# EAGLE board Charger (EAGLE 9.6.2)
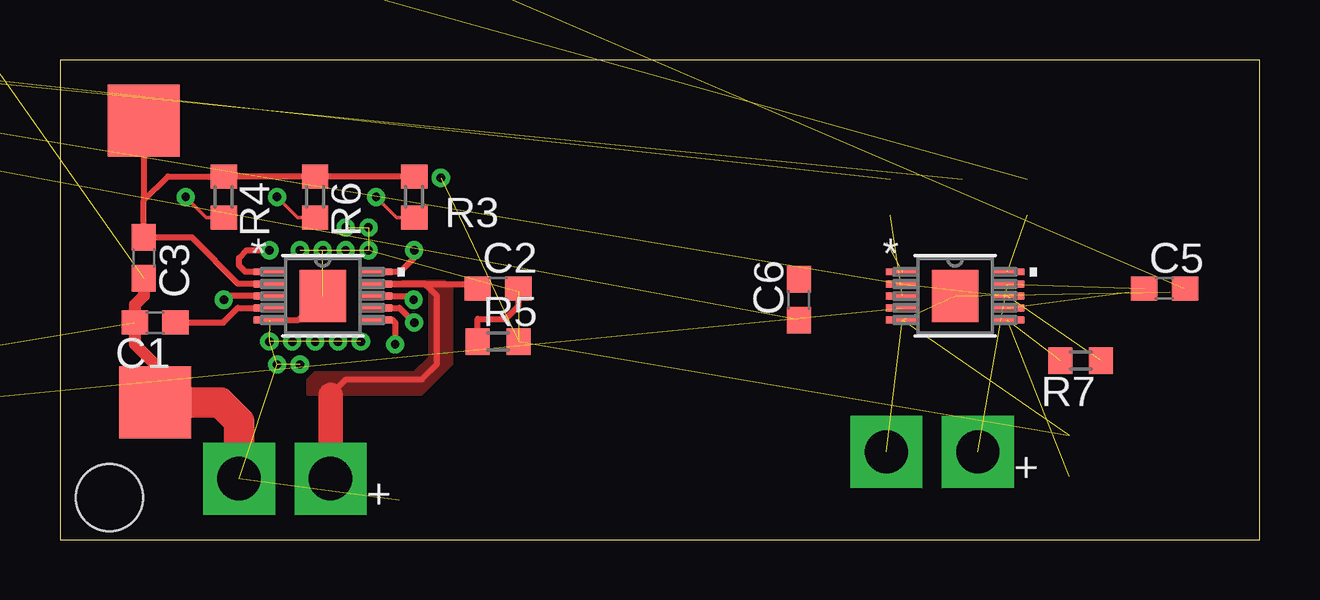
[diagram p0: board, top side]
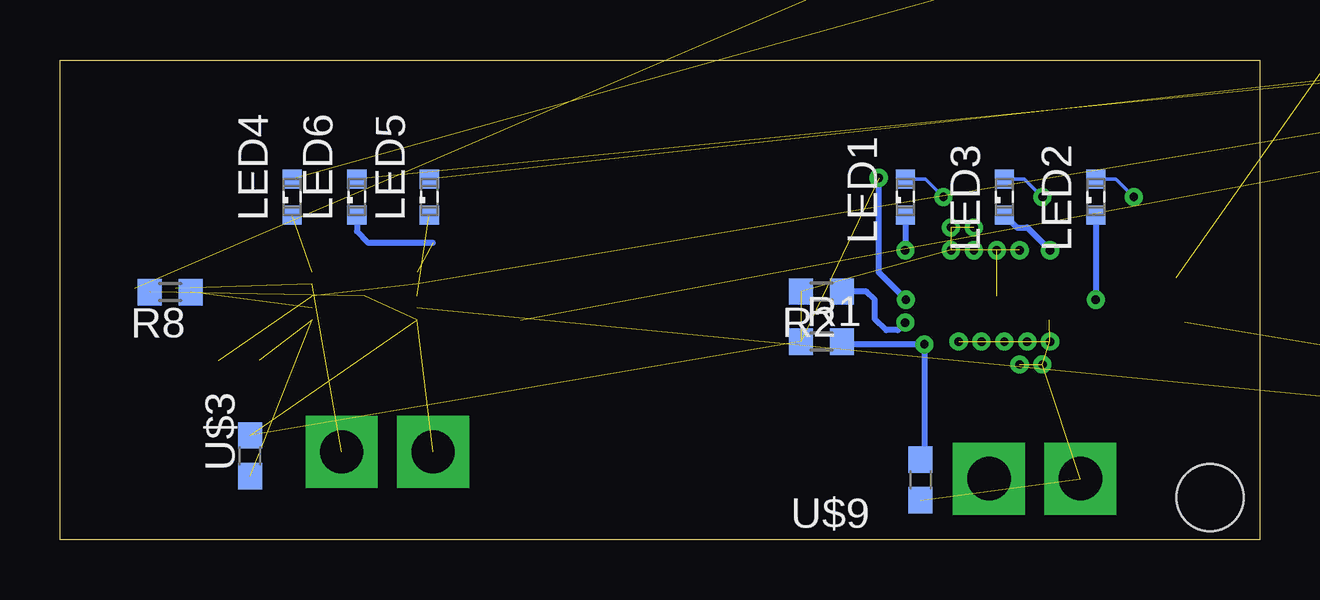
[diagram p1: board, bottom side, seen from below]

Size 50 x 20 mm. Coordinates in mm from the lower left corner, seen from the top.
Outline: 0,0 50,0 50,20 0,20 0,0
Copper layers (1*16): Top 0.035mm / dielectric 1.5mm / Bottom 0.035mm
Design rules "default": minimum track width 6mil, minimum drill 0.35mm, track to track 6mil, track to pad 6mil, pad to pad 6mil, via to via 6mil, smd to smd 6mil, copper to edge 40mil, drill to drill 6mil, minimum pad ring 10mil, minimum via ring 8mil, stop-mask expansion 4mil, vias tented up to drill 0mil, thermal gap 10mil
Holes 2.8 mm at 2.06,1.75

## Footprints (pad centres in the part's own frame; a part is rotated, then mirrored left to right if it is on the bottom)
BAT2 = drill 1.8 pad 3 square: P$1 0,0; P$2 3.81,0
C0603 = smd 1.1 x 1: 1 -0.85,0; 2 0.85,0
SML0603 = smd 0.8 x 0.8: A 0.75,0; C -0.75,0
R0603 = smd 1 x 1.1: 1 -0.85,0; 2 0.85,0
MSOP-10_MSE = smd 1.397 x 0.279: 1 -2.184,1.001; 2 -2.184,0.5; 3 -2.184,0; 4 -2.184,-0.5; 5 -2.184,-1.001; 6 2.184,-1.001; 7 2.184,-0.5; 8 2.184,0; 9 2.184,0.5; 10 2.184,1.001 | smd 1.93 x 2.159: 11 0,0
VCC = smd 3 x 3: P$1 0,0

## Placement (x,y rotation side)
BAT1  BATBAT  [BAT2]  11.27,2.54 180 top
BAT2  BAT  [BAT2]  38.26,3.65 180 top
C1  0.1uF  [C0603]  3.97,9.05 180 top
C2  4.7uF  [C0603]  18.26,10.48 0 top
C3  4.7uF  [C0603]  3.49,11.75 270 top
C4  0.1uF  [C0603]  -36.83,2.54 0 top  (outside the outline)
C5  4.7uF  [C0603]  46.04,10.48 0 top
C6  4.7uF  [C0603]  30.8,10 90 top
LED1  [SML0603]  14.76,14.29 90 bottom
LED2  [SML0603]  6.83,14.29 90 bottom
LED3  [SML0603]  10.64,14.29 90 bottom
LED4  [SML0603]  40.32,14.29 90 bottom
LED5  [SML0603]  34.61,14.29 90 bottom
LED6  [SML0603]  37.62,14.29 90 bottom
R1  475K  [R0603]  18.26,8.26 0 bottom
R2  1k  [R0603]  18.26,10.34 180 bottom
R3  1k  [R0603]  14.76,14.29 270 top
R4  1k  [R0603]  6.83,14.29 270 top
R5  1  [R0603]  18.26,8.26 0 top
R6  1k  [R0603]  10.64,14.29 270 top
R7  475K  [R0603]  42.55,7.46 180 top
R8  1k  [R0603]  45.4,10.32 180 bottom
R9  1k  [R0603]  -43.18,38.1 0 top  (outside the outline)
R10  1k  [R0603]  -36.83,22.86 0 top  (outside the outline)
R11  1  [R0603]  -16.51,38.1 0 top  (outside the outline)
R12  1k  [R0603]  -41.91,22.86 0 top  (outside the outline)
U$1  LCT1733  [MSOP-10_MSE]  10.95,10.16 0 top
U$2  LCT1733  [MSOP-10_MSE]  37.31,10.16 0 top
U$3  NTC  [C0603]  42.07,3.49 90 bottom
U$4  CONNECTOR  [VCC]  3.49,17.46 0 top
U$5  CONNECTOR  [VCC]  3.97,5.71 0 top
U$9  NTC  [C0603]  14.13,2.49 270 bottom

## Library data of the parts
BAT1 BAT2 U$1-U$5 U$9 = SamacSys_Parts
C1-C6 = rcl; SPICEPREFIX: C
LED1-LED6 = led
R1-R12 = rcl; SPICEPREFIX: R

## Nets
GND: BAT1.P$2 BAT2.P$2 C1.2 C3.2 C4.2 R2.2 R5.2 R8.2 R11.2 U$1.5 U$1.11 U$2.5 U$2.11 U$3.2 U$5.P$1 U$9.2
N$1: C3.1 R3.1 R4.1 R6.1 U$1.2 U$4.P$1
N$2: R2.1 U$1.7
N$3: LED1.C U$1.10
N$4: LED1.A R3.2
N$5: LED2.A R4.2
N$6: LED2.C U$1.3
N$7: BAT1.P$1 C2.1 U$1.9
N$8: C2.2 R5.1
N$9: C1.1 U$1.4
N$10: LED3.A R6.2
N$11: LED3.C U$1.1
N$12: R1.2 U$1.6 U$9.1
N$13: C6.1 R7.1 R9.1 R10.1 R12.1 U$2.2 U$2.8
N$14: LED4.C U$2.10
N$15: LED4.A R9.2
N$16: LED5.A R10.2
N$17: LED5.C U$2.3
N$18: BAT2.P$1 C5.1 U$2.9
N$19: R8.1 U$2.7
N$20: C5.2 R11.1
N$21: C4.1 U$2.4
N$22: LED6.A R12.2
N$23: LED6.C U$2.1
N$24: R7.2 U$2.6 U$3.1
S$1: R1.1 U$1.8

## Tracks (layer width: path | path; a pad name or v marks a point on that pad's centre or on a via)
GND  (via drill 0.35)  (24 unrouted)
  Top 0.254: U$1.5 9.95,9.16 U$1.11
  Top 0.508: C3.2 3.49,10.16 3.12,9.79 C1.2 3.12,8.15 3.97,7.3 U$5.P$1
  Top 1.27: BAT1.P$2 7.46,4.92 6.67,5.71 U$5.P$1
  other vias: 8.73,8.26 9.68,8.26 10.64,8.26 11.59,8.26 12.54,8.26 9.05,7.3 10,7.3 10,12.06 10.95,12.06 11.91,12.06 12.86,12.06 11.91,13.02 12.86,13.02
N$1
  Top 0.254: R3.1 R6.1 R4.1 4.5,15.14 3.49,14.13 | U$1.2 7.44,10.66 5.5,12.6 C3.1 3.49,14.13 | U$4.P$1 3.49,14.13
N$2  (via drill 0.35)
  Top 0.254: U$1.7 14.15,9.66 v14.76,9.05
  Bottom 0.254: v14.76,9.05 15.08,8.73 15.56,8.73 16.03,9.21 16.03,10 16.38,10.34 R2.1
N$3  (via drill 0.35)
  Top 0.254: v14.76,12.06 14.76,11.75 14.18,11.16 U$1.10
  Bottom 0.254: LED1.C v14.76,12.06
N$4  (via drill 0.35)
  Top 0.152: R3.2 14.03,13.44 v13.18,14.29
  Bottom 0.152: v13.18,14.29 13.93,15.04 LED1.A
N$5  (via drill 0.35)
  Top 0.152: R4.2 6.09,13.44 v5.24,14.29
  Bottom 0.152: v5.24,14.29 5.99,15.04 LED2.A
  Bottom 0.254: 6.73,15.14 LED2.A
N$6  (via drill 0.35)
  Top 0.254: U$1.3 6.99,10.16 v6.83,10
  Bottom 0.254: LED2.C v6.83,10
N$7
  Top 0.254: 11.27,6.03 11.91,6.67 15.08,6.67 15.72,7.3 15.72,10.16 15.22,10.66 U$1.9 17.22,10.66 C2.1
  Top 1.016: BAT1.P$1 11.27,6.03
  pour Top: 14.29,10.79 16.03,10.79 16.35,10.48 16.35,7.3 15.08,6.03 10.32,6.03 10.32,6.67 10.64,6.99 14.76,6.99 15.4,7.62 15.4,10.32 15.08,10.64 14.29,10.64
N$8
  Top 0.254: R5.1 17.41,9.21 18.57,9.21 19.11,9.74 C2.2
N$9
  Top 0.254: C1.1 6.8,9.05 7.42,9.66 U$1.4
N$10  (via drill 0.35)
  Top 0.152: v9.05,14.29 9.9,13.44 R6.2
  Bottom 0.152: LED3.A 9.8,15.04 v9.05,14.29
N$11  (via drill 0.35)
  Top 0.152: 8.73,11.2 U$1.1
  Top 0.254: U$1.1 7.73,11.16 7.46,11.43 7.46,11.75 7.78,12.06 v8.73,12.06
  Bottom 0.254: LED3.C 10.12,13.02 9.68,13.02 v8.73,12.06
N$12  (via drill 0.35)
  Top 0.254: U$1.6 13.86,9.16 13.97,9.05 v13.97,8.14
  Bottom 0.254: U$9.1 13.97,3.5 v13.97,8.14 17.29,8.14 R1.2
N$13  (6 unrouted)
N$14  (1 unrouted)
N$15  (1 unrouted)
N$16  (1 unrouted)
N$17  (1 unrouted)
N$18  (2 unrouted)
N$19  (1 unrouted)
N$20  (1 unrouted)
N$21  (1 unrouted)
N$22  (1 unrouted)
N$23  (1 unrouted)
  Bottom 0.254: LED6.C 37.62,12.86 37.15,12.38 34.45,12.38
N$24  (2 unrouted)
S$1  (via drill 0.35)  (1 unrouted)
  Top 0.254: U$1.8 14.58,10.16 v14.74,10
  Bottom 0.254: v14.74,10 15.88,11.14 v15.88,15.08